# Altium PCB 2.PcbDoc
Units mm, origin at the board's own origin, x right, y up, seen from the top; angles counter-clockwise.
Board outline 24.51 x 23.45 mm, 2 copper layers (Top Layer, Bottom Layer); 4 components, 7 nets, 16 pads, 0 vias.
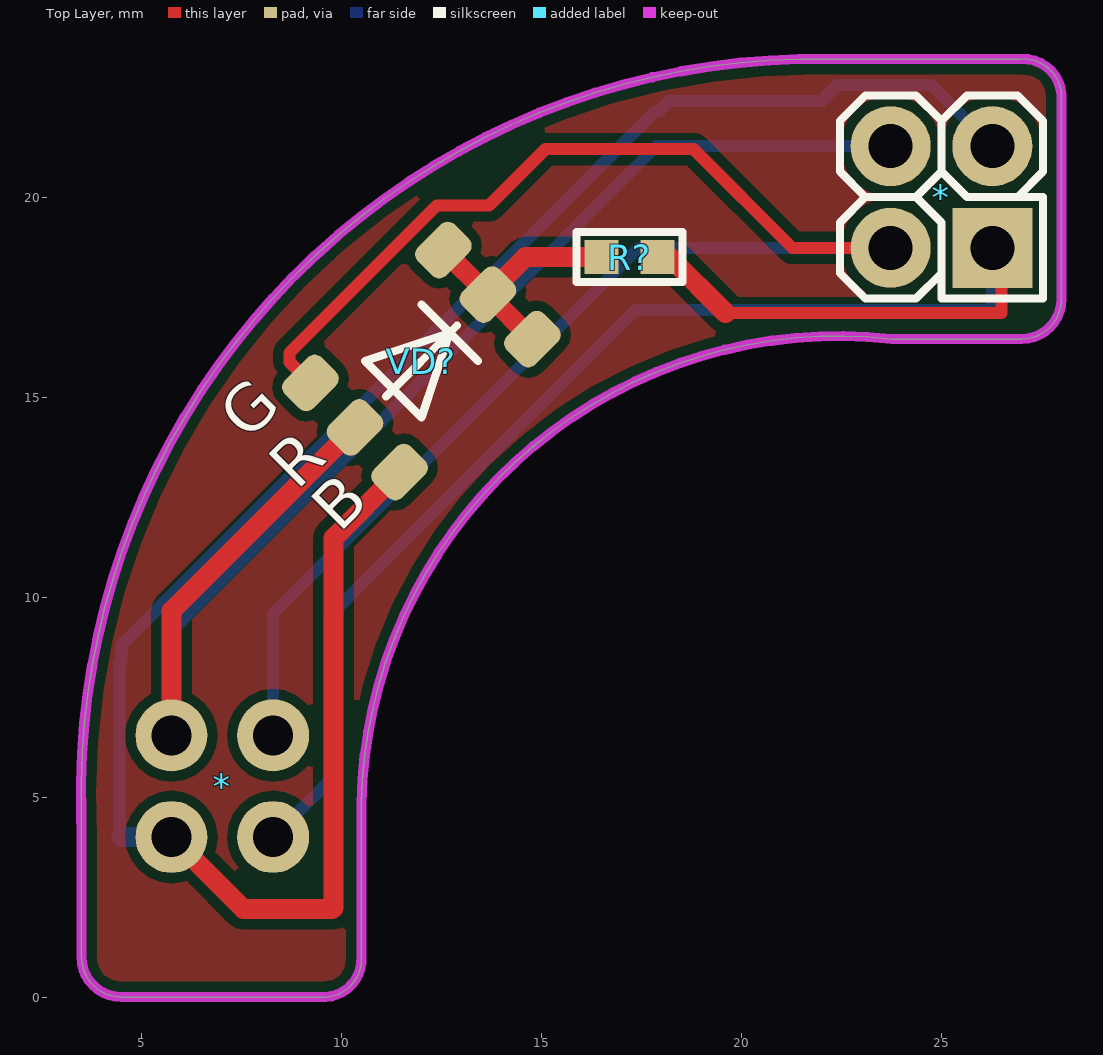
[diagram p0: Top Layer view]
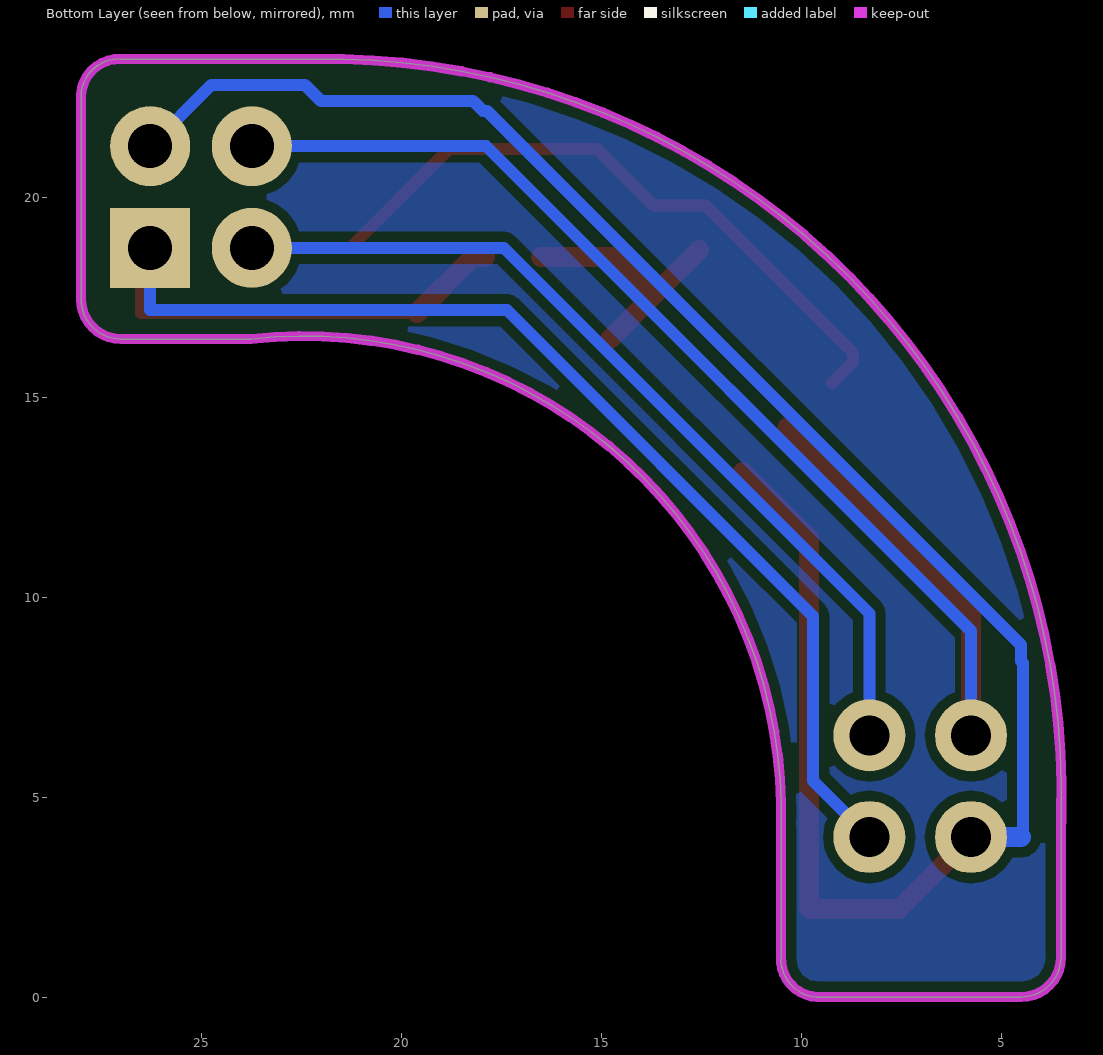
[diagram p1: Bottom Layer view, seen from below]
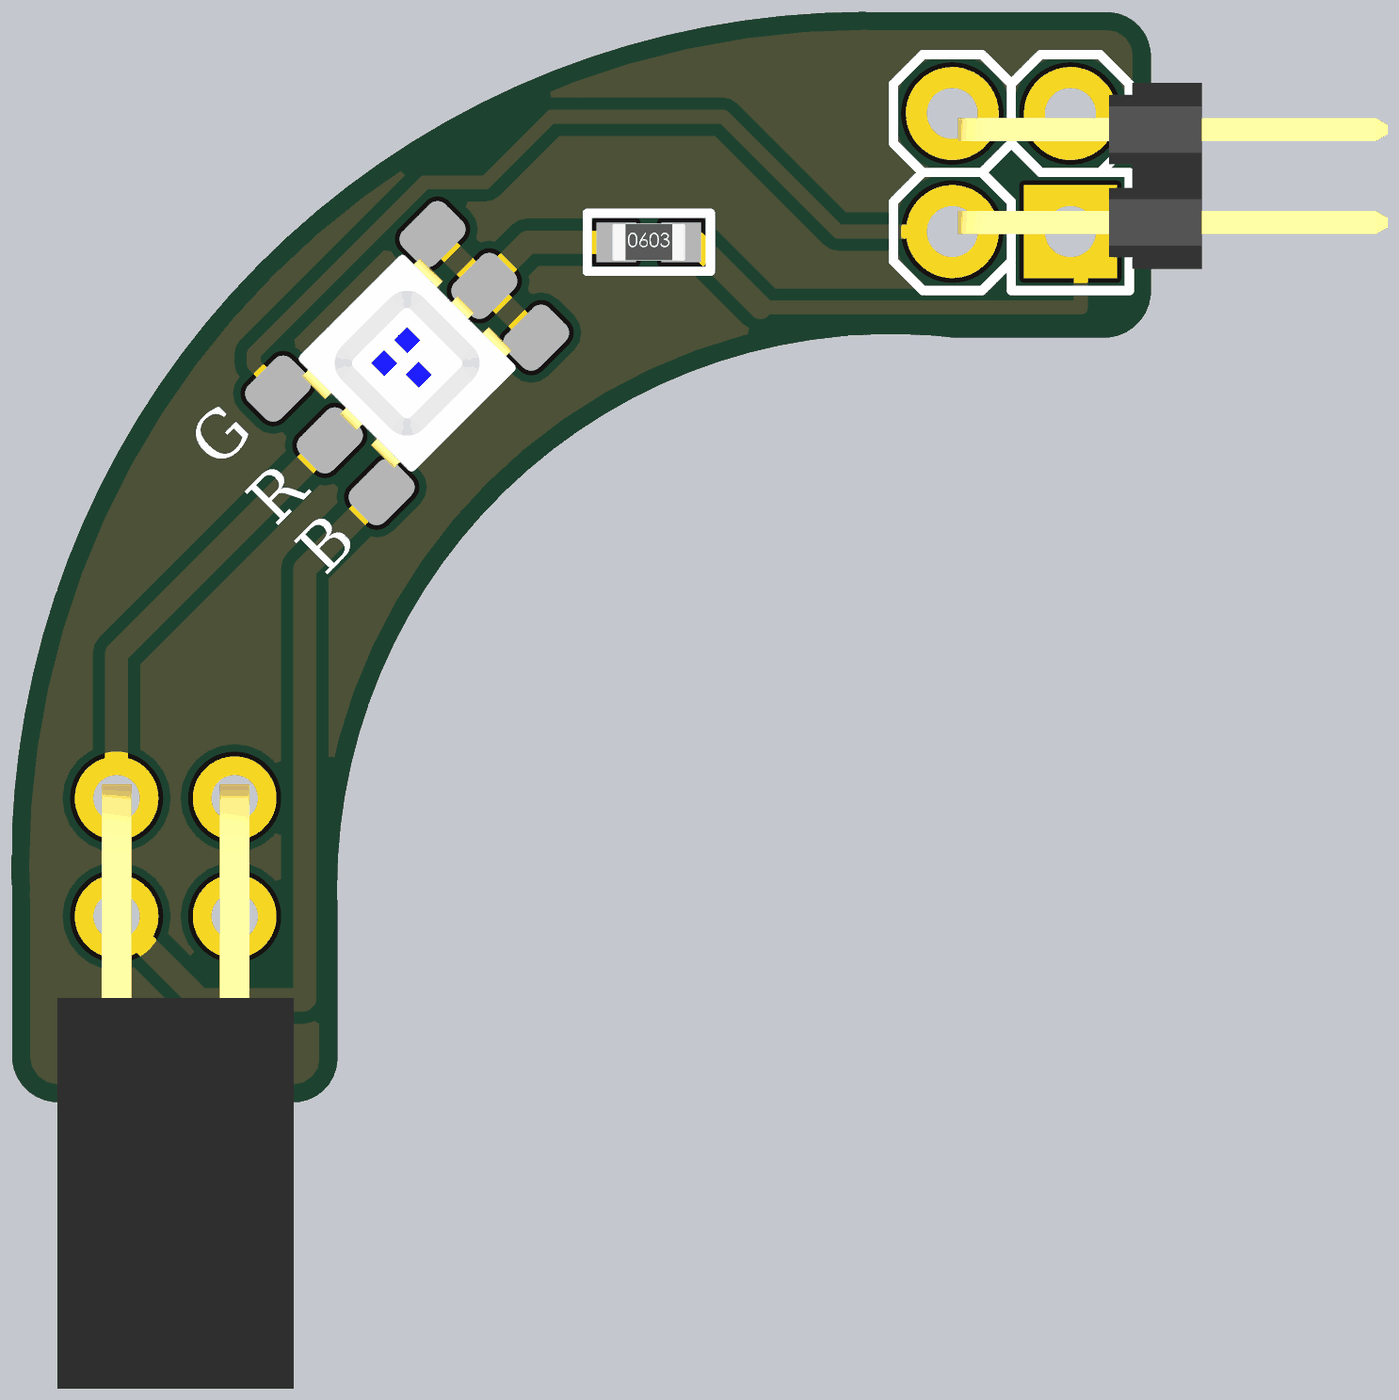
[diagram p2: 3D render of the assembled board from above, using the file's embedded part models]

## Layer stack, top to bottom
Top Solder: solder mask 0.0102, Solder Resist, Dk 3.5
Top Layer: signal copper 0.0356
Dielectric 1: dielectric 0.32, FR-4, Dk 4.8
Bottom Layer: signal copper 0.0356
Bottom Solder: solder mask 0.0102, Solder Resist, Dk 3.5

## Board outline
3.5,1 ccw(c4.5,1) 4.5,0 9.6,0 ccw(c9.55,0.95) 10.5,1 10.5,4.25 cw(c22.42,4.6) 23.75,16.45 27,16.45 ccw(c27,17.45) 28,17.45 28,22.55 ccw(c27.05,22.5) 27,23.45 22.184,23.45 ccw(c21.848,5.093) 3.494,4.609 3.5,4.04

## Design rules (kind name [scope] priority, off if disabled: settings)
Clearance [All] p1: gap=0.254 ignorepadtopadclearanceinfootprint=FALSE except(0: Arc-Hole Track-Hole SMDPad-Hole THPad-Hole Via-Hole Fill-Hole Poly-Hole Region-Hole Text-Hole)
PolygonConnect [All] p1: connectstyle=Relief reliefconductorwidth=0.254 reliefentries=4 polygonreliefangle="90 Angle" airgapwidth=0.254
RoutingVias [All] p1: holewidth=0.711 width=1.27 viastyle="Through Hole" minholewidth=0.711 minwidth=1.27 maxholewidth=0.711 maxwidth=1.27
SolderMaskExpansion [All] p1: expansion=0.102
Width [All] p1: maxlimit=2 minlimit=0.254 preferedwidth=0.5
30 further rules are at their usual default settings.

## Components (designator, comment, footprint, x,y, rotation, side; value= is the part's Value field where it differs from the comment)
* "PBD-4" PLD-4-R 25,20 r90 top
* "PBD-4" PBD-4-RIGHT 5.75,5.27 r0 top
R? "Resistor film, 100R, ±5%, 0603, 0.1W, -55...+125°C" "RES: 0603" 17.2,18.5 r0 top value=100R
VD? "VD?" RGB 12,15.9 r45 top

## Footprints (in the part's own frame and the unit in brackets; to place one, negate y for a bottom-side part, rotate by r counter-clockwise, add the part's x,y. Pads: shape width x height; smd on the part's side, far side on the other; paste and mask are expansions set on the pad)
PBD-4-RIGHT [mm]
  round 1.8 hole 1: 1(0,1.27) 2(2.54,1.27) 3(0,-1.27) 4(2.54,-1.27)
  body extent -1.27,-11.43 3.81,1.57, height 5
PLD-4-R [mm]
  rect 2x2 hole 1.1: 1(-1.27,-1.27)
  round 2 hole 1.1: 2(-1.27,1.27) 3(1.27,-1.27) 4(1.27,1.27)
  silkscreen extent -2.54,-2.54 2.54,2.54, body extent -2.07,-8.1 1.92,1.15, height 4
"RES: 0603" [mm]
  rect 0.85x0.85 smd: 1(-0.7,0) 2(0.7,0)
  silkscreen extent -1.33,-0.63 1.33,0.63, body extent -0.8,-0.4 0.8,0.4, height 0.44
RGB [mm]
  rrect50% 1.3x1 smd: 1(2.35,1.575) 2(2.35,0) 3(2.35,-1.575) 4(-2.35,1.575) 5(-2.35,0) 6(-2.35,-1.575)
  silkscreen extent -1.25,-1 1.25,1, body extent -1.8,-1.75 1.8,1.75, height 2.01

## Part data
R?: library part Resistor_0603, Manufacturer=Yageo, Package=0603, PartNumber=RC0603JR-07100RL, Power=0.1W, Temperature=-55...+125°C, Tolerance=±5%, TypeResistor="Resistor film", HelpURL=https://www.digikey.com/product-detail/en/yageo/RC0603JR-07100RL/311-100GRCT-ND/729644, ValueManufacturerPartNumber="Resistor film, 100R, ±5%, 0603, 0.1W, -55...+125°C"
VD?: library part RGB

## Nets (pads, with @x,y where several pads share a name; then routed paths per layer and width w, separated by ;. In a path a pad name is that pad's centre, name@x,y a point inside that pad or via, vN(x,y) a via of type N, cw(c..) or ccw(c..) an arc to the next point about the centre after c; other vN are vias at no path point)
gnd: *.1@26.27,18.73 *.4@8.29,4 R?.2 | length 38.3
  Top Layer w0.3: 19.604,17.096 26.496,17.096 26.496,18.504 *.1@26.27,18.73
  Top Layer w0.5: R?.2 18.2,18.5 19.604,17.096
  Bottom Layer w0.3: *.4@8.29,4 9.7,5.41 9.7,9.523 17.347,17.17 26.27,17.17 *.1@26.27,18.73
Net*_1: *.1@5.75,6.54 *.4@23.73,21.27 VD?.5 | length 35.2
  Top Layer w0.5: *.1@5.75,6.54 5.75,9.65 VD?.5
  Bottom Layer w0.3: *.1@5.75,6.54 5.75,9.15 17.87,21.27 *.4@23.73,21.27
Net*_2: *.2 VD?.4 | length 41.4
  Top Layer w0.3: VD?.4 8.7,15.877 8.7,16.106 12.383,19.789 13.689,19.789 15.1,21.2 18.8,21.2 21.27,18.73 *.2@23.73,18.73
  Bottom Layer w0.3: *.2@8.29,6.54 8.29,9.59 17.43,18.73 *.2@23.73,18.73
Net*_3: *.3 VD?.6 | length 50.7
  Top Layer w0.5: *.3@5.75,4 7.55,2.2 9.769,2.2 9.8,2.231 9.8,11.473 VD?.6
  Bottom Layer w0.3: 4.5,4 4.446,4.054 4.446,8.346 4.501,8.401 4.501,8.801 17.851,22.151 17.945,22.151 18.194,22.4 22,22.4 22.4,22.8 24.74,22.8 *.3@26.27,21.27
  Bottom Layer w0.5: 4.5,4 *.3@5.75,4
NetR?_1: R?.1 VD?.1 VD?.2 VD?.3 | length 6.4
  Top Layer w0.5: VD?.1 VD?.2 ; VD?.3 VD?.2 ; R?.1 14.6,18.5 VD?.2
NetVD?_2: 
track: 

## Polygon pours and split planes (outlines as drawn)
no net on Top Layer "Top Layer-No Net" (solid, pour order 0): 3.5,1 ccw(c4.5,1) 4.5,0 9.6,0 ccw(c9.55,0.95) 10.5,1 10.5,4.25 cw(c22.42,4.6) 23.75,16.45 27,16.45 ccw(c27,17.45) 28,17.45 28,22.55 ccw(c27.05,22.5) 27,23.45 22.184,23.45 ccw(c21.848,5.093) 3.494,4.609 3.5,4.04
no net on Bottom Layer "Top Layer-No Net1" (solid, pour order 1): 3.5,1 ccw(c4.5,1) 4.5,0 9.6,0 ccw(c9.55,0.95) 10.5,1 10.5,4.25 cw(c22.42,4.6) 23.75,16.45 27,16.45 ccw(c27,17.45) 28,17.45 28,22.55 ccw(c27.05,22.5) 27,23.45 22.184,23.45 ccw(c21.848,5.093) 3.494,4.609 3.5,4.04

## Keep-outs
Keep-Out Layer:
  the board outline again, w0.254

## Text inside footprints (layer, text, board x,y; h text height)
VD?: Top Overlay "B" at 10.232,11.304 h2 r45; Top Overlay "R" at 9.172,12.364 h2 r45; Top Overlay "G" at 7.934,13.602 h2 r45